# Altium PCB uTCA_MCH_PCB3.pcbdoc (part 2 of 8)
Units mm, origin at the board's own origin, x right, y up, seen from the top; angles counter-clockwise.
Board outline 182.75 x 75.8 mm, 10 copper layers (Top Layer, GND1, MidLayer1, PWR1, Mid-Layer 2, GND2, PWR2, Mid-Layer 3, GND3, Bottom Layer), stack 1.568 mm thick; 778 components, 977 nets, 4756 pads, 1214 vias.
Unrouted connection lines stored in the file: 1790.
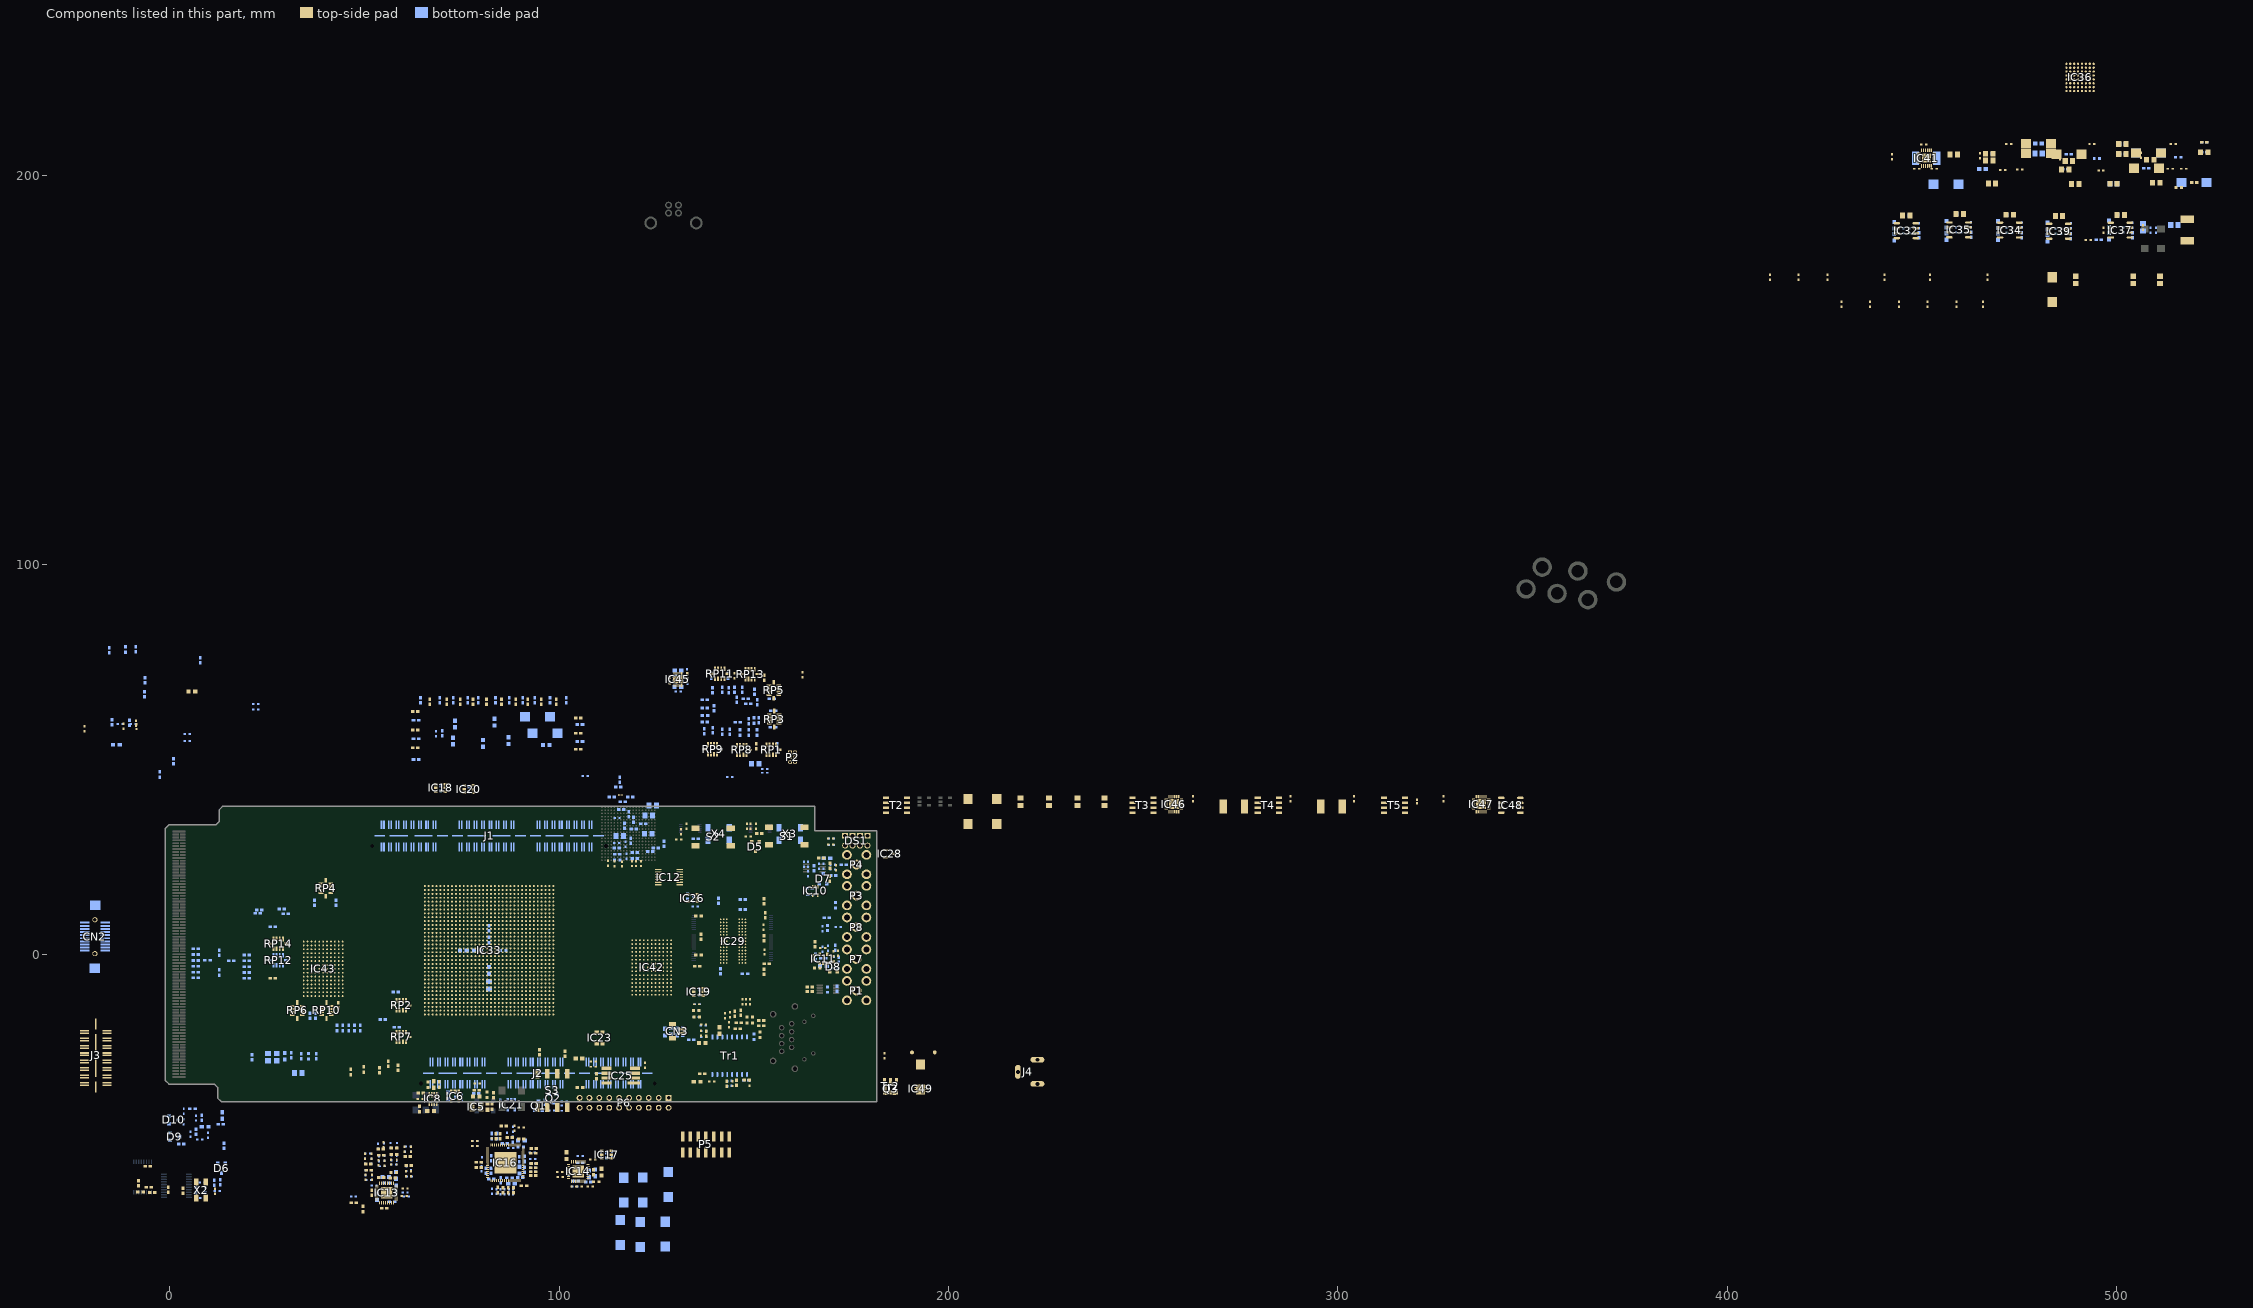
[diagram p10: the components of this part, seen from the top]

## Components (designator, comment, footprint, x,y, rotation, side; value= is the part's Value field where it differs from the comment) (continued)
R87 "200R" 0402 88.15,-60.4 r270 bottom
R88 "200R" 0402 87.15,-60.4 r270 bottom
R89 "200R" 0402 92.65,-56.7 r0 bottom
R90 "100R" 0402 82.7,-47.36 r0 top
R91 "200R" 0402 92.65,-55.75 r0 bottom
R92 "200R" 0402 92.6,-54.75 r0 bottom
R93 "200R" 0402 92.6,-53.75 r0 bottom
R94 "49R9" 0402 22.7,62.85 r180 bottom
R95 "49R9" 0402 22.7,64.25 r180 bottom
R96 "49R9" 0402 5.1,56.6 r180 bottom
R97 "49R9" 0402 5.1,54.8 r180 bottom
R98 "4K12" 0402 51.9,-57.9 r90 top
R99 "4K12" 0402 55.1,-54.3 r90 top
R100 "4K7" 0402 50.3,-57.95 r90 top
R101 "1K" 0402 51.9,-55.45 r270 bottom
R102 "4K7" 0402 53.65,-54.2 r90 top
R103 "1K" 0402 55.1,-51.75 r270 bottom
R104 "1K" 0402 50.3,-55.45 r270 bottom
R105 "1K" 0402 53.75,-51.85 r270 bottom
R106 "10k" 0402 50.45,-58 r0 bottom
R107 "4K7" 0402 53.9,-54.45 r0 bottom
R108 "4K12" 0402 -21.85,58.5 r270 top
R109 "4K12" 0402 50.2,-51.25 r270 top
R110 "4K7" 0402 -11.9,59.15 r270 top
R111 "4K7" 0402 51.8,-51.25 r270 top
R112 "1K" 0402 53.45,-49.9 r90 bottom
R113 "1K" 0402 50.2,-53.8 r90 bottom
R114 "1K" 0402 55.05,-49.8 r90 bottom
R115 "1K" 0402 51.8,-53.8 r90 bottom
R116 "22K" 0402 -12.1,59.1 r180 bottom
R117 "4K7" 0402 51.5,-51.2 r180 bottom
R118 "4K12" 0402 60.35,-49.4 r270 top
R119 "4K12" 0402 61.9,-57 r90 top
R120 "4K7" 0402 61.9,-49.45 r270 top
R121 "1K" 0402 60.4,-52 r90 bottom
R122 "4K7" 0402 60.7,-57 r90 top
R123 "1K" 0402 61.95,-54.25 r270 bottom
R124 "1K" 0402 61.95,-52.05 r90 bottom
R125 "1K" 0402 60.75,-54.4 r270 bottom
R126 "4K7" 0402 61.85,-49.4 r180 bottom
R127 "22K" 0402 60.85,-57.05 r0 bottom
R128 "10k" 0402 113.6,-50.7 r270 bottom
R129 "10k" 0402 110.8,-50.8 r270 bottom
R130 "4K12" 0402 54.95,-49.6 r90 top
R131 "4K12" 0402 58.3,-54 r90 top
R132 "4K7" 0402 -8.5,59.1 r270 top
R133 "1K" 0402 56.75,-49.75 r90 bottom
R134 "4K7" 0402 56.85,-54 r90 top
R135 "1K" 0402 58.3,-51.75 r270 bottom
R136 "1K" 0402 58.4,-49.75 r90 bottom
R137 "1K" 0402 56.9,-51.6 r270 bottom
R138 "10k" 0402 -8.7,59.1 r180 bottom
R139 "22K" 0402 56.95,-54.05 r0 bottom
R140 "Jumper" 0402 143.84,-14.87 r270 top
R141 "Jumper" 0402 142.53,-15.18 r270 top
R142 "33R" 0402 144.52,-32.57 r270 top
R143 "33R" 0402 144.27,-33.81 r90 bottom
R144 "33R" 0402 143.24,-32.63 r270 bottom
R145 "470R" 0402 143.57,-17.48 r270 top
R146 "33R" 0402 148.98,-11.58 r270 top
R147 "33R" 0402 148.03,-11.58 r270 top
R148 "Jumper" 0402 137.77,-19.66 r180 bottom
R149 "Jumper" 0402 137.61,-18.27 r180 bottom
R150 "Jumper" 0402 136.38,-20.97 r90 top
R151 "33R" 0402 147.12,-12.84 r90 top
R152 "Jumper" 0402 136.44,-18.09 r0 top
R153 "Jumper" 0402 139.81,-32.73 r180 top
R154 "49R9" 0603 150.05,-21.85 r90 bottom
R155 "49R9" 0603 151.55,-21.35 r90 top
R156 "49R9" 0603 148.2,-17.71 r0 top
R157 "49R9" 0603 148.2,-16.13 r0 top
R158 "Jumper" 0402 148.85,-32.45 r270 top
R159 "1K5" 0402 136.54,-21.26 r0 bottom
R160 "1K" 0402 169.15,28.15 r0 top
R161 "1K" 0402 169.15,29.7 r0 top
R162 "1K" 0402 169.2,29.7 r0 bottom
R163 "1K" 0402 169.2,28 r0 bottom
R164 "o.c." 0402 108.15,-27.55 r0 top
R165 "10K" 0402 109.4,-28.9 r180 top
R166 "10K" 0402 122.05,-29.2 r90 top
R167 "10K" 0402 152.71,1.2 r270 top
R168 "10K" 0402 152.53,7.58 r270 top
R169 "10K" 0402 134.32,14.8 r270 bottom
R170 "10K" 0402 135.62,12.21 r180 bottom
R171 "330K" 0402 135.85,-16.1 r180 bottom
R172 "33R" 0603 136,-16.15 r180 top
R173 "33R" 0603 134.55,-14.5 r0 top
R174 "330K" 0402 135.85,-14.5 r180 bottom
R175 "30K" 0402 136.1,-12.85 r180 bottom
R176 "22K" 0402 136,-12.85 r180 top
R177 "300R" 0402 513.1,201.7 r0 top
R178 "4K87" 0402 446.7,185.1 r90 bottom
R179 "Jumper" 0402 516.5,201.7 r0 top
R180 "2K43" 0402 449.2,186.45 r90 bottom
R181 "10k" 0402 445.25,185.1 r90 bottom
R182 "200R" 0402 506.25,204.55 r90 top
R183 "Jumper" 0402 515.1,208.1 r180 top
R184 "200R" 0402 183.6,-26.658 r90 top
R185 "4K7" 0402 473.2,185.3 r90 bottom
R186 "1K5" 0402 460.15,185.35 r90 bottom
R187 "Jumper" 0402 495.3,201.3 r0 top
R188 "10K" 0402 475.6,187.9 r270 bottom
R189 "4K7" 0402 462.6,187.95 r270 bottom
R190 "10k" 0402 471.7,185.3 r90 bottom
R191 "10k" 0402 458.7,185.35 r90 bottom
R192 "Jumper" 0402 485.35,205.45 r270 top
R193 "1K" 0402 494.25,208 r180 top
R194 "1K" 0402 470.1,201.4 r0 top
R195 "4K7" 0402 496.6,185.3 r90 top
R196 "4K87" 0402 501.7,185.35 r90 bottom
R197 "12K1" 0402 474.45,201.5 r0 top
R198 "2K43" 0402 504,186.6 r90 bottom
R199 "10k" 0402 493.25,183.45 r180 top
R200 "4K7" 0402 464.85,204.35 r90 top
R201 "4K7" 0402 472.85,208.1 r180 top
R202 "4K7" 0402 448,201.7 r0 top
R203 "4K7" 0402 452.5,201.7 r0 top
R204 "4K12" 0402 485.8,185.05 r90 bottom
R205 "1K" 0402 488.2,186.45 r90 bottom
R206 "22K" 0402 508.6,185.3 r90 bottom
R207 "10K" 0402 484.3,185.05 r90 bottom
R208 "4K7" 0402 506.7,187.25 r270 top
R209 "4K7" 0402 510,186.5 r270 bottom
R210 "Jumper" 0402 442.25,204.2 r90 top
R211 "10K" 0402 451.1,207.95 r180 top
R212 "10k" 0402 132.83,73.23 r270 bottom
R213 "10k" 0402 132.91,70.77 r270 bottom
R214 "10k" 0402 131.23,67.44 r180 bottom
R215 "249R" 0402 145,72.1 r270 top
R216 "249R" 0402 -8.7,58.7 r90 top
R217 "2K2" 0402 153.45,47.6 r180 bottom
R218 "1K" 0402 153.45,46.6 r180 bottom
R219 "2K2" 0402 89.62,-44.45 r0 top
R220 "1K" 0402 88.52,-45.38 r90 top
R221 "2K2" 0402 77.75,-47.95 r0 bottom
R222 "2K2" 0402 77.75,-49.3 r0 bottom
R223 "1K" 0402 78.95,-48 r180 top
R224 "1K" 0402 79,-49.25 r180 top
R225 "1K" 0402 88.1,-45.63 r90 bottom
R226 "2K2" 0402 46.56,-62.21 r0 bottom
R227 "o.c." 0402 429.3,166.242 r90 top
R228 "9K31" 0402 436.65,166.242 r90 top
R229 "4K7" 0402 444.05,166.242 r90 top
R230 "2K8" 0402 451.399,166.242 r90 top
R231 "10K" 0402 458.799,166.242 r90 top
R232 "4K7" 0402 465.649,166.242 r90 top
R233 "Jumper" 0402 410.949,173.242 r90 top
R234 "10K" 0402 418.299,173.242 r90 top
R235 "o.c." 0402 425.699,173.242 r90 top
R236 "1K5" 0402 440.399,173.242 r90 top
R237 "4K7" 0402 452.049,173.242 r90 top
R238 "10K" 0402 466.799,173.242 r90 top
R239 "4K7" 0402 287.849,39.242 r90 top
R240 "4K7" 0402 304.099,39.242 r90 top
R241 "13k" RESC1005X40N 320.299,39.242 r90 top
R242 "10K" 0402 327.149,39.242 r90 top
R243 "4K7" 0402 262.749,39.242 r90 top
RP1 "47R x 8" EXBE 154.46,52.51 r270 top
RP2 "47R x 8" EXBE 59.45,-13.15 r90 top
RP3 "47R x 8" EXBE 155.22,60.39 r180 top
RP4 "47R x 8" EXBE 40.1,16.95 r0 top
RP5 "47R x 8" EXBE 155.15,67.81 r0 top
RP6 "47R x 8" EXBE 32.75,-14.45 r0 top
RP7 "47R x 8" EXBE 59.45,-21.25 r270 top
RP8 "47R x 8" EXBE 146.89,52.44 r90 top
RP9 "47R x 8" EXBE 139.39,52.59 r90 top
RP10 "47R x 8" EXBE 40.25,-14.45 r0 top
RP11 "47R x 8" EXBE 141.23,72.02 r90 top
RP12 "47R x 8" EXBE 27.85,-1.55 r270 bottom
RP13 "47R x 8" EXBE 149.03,71.94 r270 top
RP14 "47R x 8" EXBE 27.85,2.65 r90 top
S1 "FSM6JSMA" SWITCH 158.43,30.32 r90 top
S2 "FSM6JSMA" SWITCH 139.54,30.14 r270 top
S3 "219-4MST" NHDS-8 102.05,-30.65 r270 top
T2 "IRF9910Pbf" SOIC127P600X175-8N 186.65,38.242 r0 top
T3 "IRF9910Pbf" SOIC127P600X175-8N 249.899,38.242 r0 top
T4 "IRF9910Pbf" SOIC127P600X175-8N 282.099,38.242 r0 top
T5 "IRF9910Pbf" SOIC127P600X175-8N 314.549,38.242 r0 top
TP1 "Test Point" TEST_PAD_1mm 196.45,-25.208 r90 top
TP2 "Test Point" TEST_PAD_1mm 190.6,-25.208 r90 top
Tr1 "TR_H1260NL" H1260NL 139.36,-21.23 r270 bottom
Tr2 "WBC1-1LB" SMT6P150P 183.55,-32.408 r0 top
X1 "R26-32.768- 12.5" XTAL_32k 115.7,40.9 r180 top
X2 "ABM3B 18.432 MHz" XTALL_ABM3 6.85,-58.55 r270 top
X3 "ABS25-32.768KHZ-6-T" ABS25 159.22,30.89 r90 bottom
X4 "ABS25-32.768KHZ-6-T" ABS25 140.94,30.89 r90 bottom

## Footprints (in the part's own frame and the unit in brackets; to place one, negate y for a bottom-side part, rotate by r counter-clockwise, add the part's x,y. Pads: shape width x height; smd on the part's side, far side on the other; paste and mask are expansions set on the pad)
"3 mm LED Quad-Level" [mil]
  round 60 hole 40: 1(-50,112.5) 3(-50,37.5) 5(-50,-37.5) 7(-50,-112.5)
  rect 60x60 hole 40: 2(50,112.5) 4(50,37.5) 6(50,-37.5) 8(50,-112.5)
  silkscreen extent -89,-196 89,226
8CN3 [mm] "Double Row QFN, 8Leads, Body 6,1x8,1mm (max), Pitch 1,27mm, IPC Medium Density"
  rect 3.2x0.8 smd: 1(-3.35,1.905)
  rect 2.6x0.8 smd: 2(-3.65,0.635) 3(-3.65,-0.635) 4(-3.65,-1.905) 5(3.65,-1.905) 6(3.65,-0.635) 7(3.65,0.635) 8(3.65,1.905)
  silkscreen extent -4.82,-3.05 4.05,3.25, body extent -4.06,-3.05 4.06,3.02, height 1
0402 [mil]
  rect 25x20 smd: 1(0,0) 2(50,0)
  silkscreen extent -30,-25 77,25
0603 [mil]
  rect 30x30 smd: 1(0,0) 2(55,0)
  silkscreen extent -30,-30 85,30
ABS25 [mm] "32.768 kHzFREQUENCY SMD CRYSTAL LOW PROFILE, HEAT RESISTANT PLASTIC PACKAGE"
  rect 1.9x1.3 smd: 1(1.6,-2.75) 2(1.6,2.75) 3(-1.6,2.75) 4(-1.6,-2.75)
  silkscreen extent -1.6,-4 1.6,4
BGA64C100P8X8_1300X1000X120 [mm] "BGA, 64-Leads, Body 13,0x10,0mm,  Pitch 1,00mm"
  round 0.58 smd: A1(-3.5,3.5) A2(-2.5,3.5) A3(-1.5,3.5) A4(-0.5,3.5) A5(0.5,3.5) A6(1.5,3.5) A7(2.5,3.5) A8(3.5,3.5) B1(-3.5,2.5) B2(-2.5,2.5) B3(-1.5,2.5) B4(-0.5,2.5) B5(0.5,2.5) B6(1.5,2.5) B7(2.5,2.5) B8(3.5,2.5) C1(-3.5,1.5) C2(-2.5,1.5) C3(-1.5,1.5) C4(-0.5,1.5) C5(0.5,1.5) C6(1.5,1.5) C7(2.5,1.5) C8(3.5,1.5) D1(-3.5,0.5) D2(-2.5,0.5) D3(-1.5,0.5) D4(-0.5,0.5) D5(0.5,0.5) D6(1.5,0.5) D7(2.5,0.5) D8(3.5,0.5) E1(-3.5,-0.5) E2(-2.5,-0.5) E3(-1.5,-0.5) E4(-0.5,-0.5) E5(0.5,-0.5) E6(1.5,-0.5) E7(2.5,-0.5) E8(3.5,-0.5) F1(-3.5,-1.5) F2(-2.5,-1.5) F3(-1.5,-1.5) F4(-0.5,-1.5) F5(0.5,-1.5) F6(1.5,-1.5) F7(2.5,-1.5) F8(3.5,-1.5) G1(-3.5,-2.5) G2(-2.5,-2.5) G3(-1.5,-2.5) G4(-0.5,-2.5) G5(0.5,-2.5) G6(1.5,-2.5) G7(2.5,-2.5) G8(3.5,-2.5) H1(-3.5,-3.5) H2(-2.5,-3.5) H3(-1.5,-3.5) H4(-0.5,-3.5) H5(0.5,-3.5) H6(1.5,-3.5) H7(2.5,-3.5) H8(3.5,-3.5)
  silkscreen extent -5.77,-6.5 5,6.5, body extent -5,-6.5 5,6.5, height 1.2
BGA90C80P9X15_1300X1100X120 [mm] "BGA 0.8mm, Pitch, Square 90 Pin, 9 Columns x 15 Rows, Body 13mm X 11mm X 1.2mm H"
  round 0.4 smd: A1(-3.2,5.6) A2(-2.4,5.6) A3(-1.6,5.6) A7(1.6,5.6) A8(2.4,5.6) A9(3.2,5.6) B1(-3.2,4.8) B2(-2.4,4.8) B3(-1.6,4.8) B7(1.6,4.8) B8(2.4,4.8) B9(3.2,4.8) C1(-3.2,4) C2(-2.4,4) C3(-1.6,4) C7(1.6,4) C8(2.4,4) C9(3.2,4) D1(-3.2,3.2) D2(-2.4,3.2) D3(-1.6,3.2) D7(1.6,3.2) D8(2.4,3.2) D9(3.2,3.2) E1(-3.2,2.4) E2(-2.4,2.4) E3(-1.6,2.4) E7(1.6,2.4) E8(2.4,2.4) E9(3.2,2.4) F1(-3.2,1.6) F2(-2.4,1.6) F3(-1.6,1.6) F7(1.6,1.6) F8(2.4,1.6) F9(3.2,1.6) G1(-3.2,0.8) G2(-2.4,0.8) G3(-1.6,0.8) G7(1.6,0.8) G8(2.4,0.8) G9(3.2,0.8) H1(-3.2,0) H2(-2.4,0) H3(-1.6,0) H7(1.6,0) H8(2.4,0) H9(3.2,0) J1(-3.2,-0.8) J2(-2.4,-0.8) J3(-1.6,-0.8) J7(1.6,-0.8) J8(2.4,-0.8) J9(3.2,-0.8) K1(-3.2,-1.6) K2(-2.413,-1.6) K3(-1.6,-1.6) K7(1.6,-1.6) K8(2.4,-1.6) K9(3.2,-1.6) L1(-3.2,-2.4) L2(-2.4,-2.4) L3(-1.6,-2.4) L7(1.6,-2.4) L8(2.4,-2.4) L9(3.2,-2.4) M1(-3.2,-3.2) M2(-2.4,-3.2) M3(-1.6,-3.2) M7(1.6,-3.2) M8(2.4,-3.2) M9(3.2,-3.2) N1(-3.2,-4) N2(-2.4,-4) N3(-1.6,-4) N7(1.6,-4) N8(2.4,-4) N9(3.2,-4) P1(-3.2,-4.8) P2(-2.4,-4.8) P3(-1.6,-4.8) P7(1.6,-4.8) P8(2.4,-4.8) P9(3.2,-4.8) R1(-3.2,-5.6) R2(-2.4,-5.6) R3(-1.6,-5.6) R7(1.6,-5.6) R8(2.4,-5.6) R9(3.2,-5.6)
  silkscreen extent -6.16,-6.5 5.5,6.5
BGA165C100P11X15_1300X1500X140 [mm] "BGA, 1.00mm pitch,rect.;165 pin, 11 columns X 15 rows, 13.00mm X 15.00mm X 1.40mm H"
  round 0.45 smd: A1(-5,7) A2(-4,7) A3(-3,7) A4(-2,7) A5(-1,7) A6(0,7) A7(1,7) A8(2,7) A9(3,7) A10(4,7) A11(5,7) B1(-5,6) B2(-4,6) B3(-3,6) B4(-2,6) B5(-1,6) B6(0,6) B7(1,6) B8(2,6) B9(3,6) B10(4,6) B11(5,6) C1(-5,5) C2(-4,5) C3(-3,5) C4(-2,5) C5(-1,5) C6(0,5) C7(1,5) C8(2,5) C9(3,5) C10(4,5) C11(5,5) D1(-5,4) D2(-4,4) D3(-3,4) D4(-2,4) D5(-1,4) D6(0,4) D7(1,4) D8(2,4) D9(3,4) D10(4,4) D11(5,4) E1(-5,3) E2(-4,3) E3(-3,3) E4(-2,3) E5(-1,3) E6(0,3) E7(1,3) E8(2,3) E9(3,3) E10(4,3) E11(5,3) F1(-5,2) F2(-4,2) F3(-3,2) F4(-2,2) F5(-1,2) F6(0,2) F7(1,2) F8(2,2) F9(3,2) F10(4,2) F11(5,2) G1(-5,1) G2(-4,1) G3(-3,1) G4(-2,1) G5(-1,1) G6(0,1) G7(1,1) G8(2,1) G9(3,1) G10(4,1) G11(5,1) H1(-5,0) H2(-4,0) H3(-3,0) H4(-2,0) H5(-1,0) H6(0,0) H7(1,0) H8(2,0) H9(3,0) H10(4,0) H11(5,0) J1(-5,-1) J2(-4,-1) J3(-3,-1) J4(-2,-1) J5(-1,-1) J6(0,-1) J7(1,-1) J8(2,-1) J9(3,-1) J10(4,-1) J11(5,-1) K1(-5,-2) K2(-4,-2) K3(-3,-2) K4(-2,-2) K5(-1,-2) K6(0,-2) K7(1,-2) K8(2,-2) K9(3,-2) K10(4,-2) K11(5,-2) L1(-5,-3) L2(-4,-3) L3(-3,-3) L4(-2,-3) L5(-1,-3) L6(0,-3) L7(1,-3) L8(2,-3) L9(3,-3) L10(4,-3) L11(5,-3) M1(-5,-4) M2(-4,-4) M3(-3,-4) M4(-2,-4) M5(-1,-4) M6(0,-4) M7(1,-4) M8(2,-4) M9(3,-4) M10(4,-4) M11(5,-4) N1(-5,-5) N2(-4,-5) N3(-3,-5) N4(-2,-5) N5(-1,-5) N6(0,-5) N7(1,-5) N8(2,-5) N9(3,-5) N10(4,-5) N11(5,-5) P1(-5,-6) P2(-4,-6) P3(-3,-6) P4(-2,-6) P5(-1,-6) P6(0,-6) P7(1,-6) P8(2,-6) P9(3,-6) P10(4,-6) P11(5,-6) R1(-5,-7) R2(-4,-7) R3(-3,-7) R4(-2,-7) R5(-1,-7) R6(0,-7) R7(1,-7) R8(2,-7) R9(3,-7) R10(4,-7) R11(5,-7)
  silkscreen extent -7.23,-7.6 6.5,7.87, body extent -6.5,-7.5 6.5,7.5, height 1.4
CC1005-0402 [mm]
  rect 0.9x0.7 smd: 1(-0.65,0) 2(0.65,0)
  silkscreen extent -1.5,-0.75 1.5,0.75
CC1608-0603 [mm]
  rect 1.1x1 smd: 1(-0.85,0) 2(0.85,0)
  silkscreen extent -1.8,-0.9 1.8,0.9
CC2012-0805 [mm]
  rect 1.3x1.5 smd: 1(-0.95,0) 2(0.95,0)
  silkscreen extent -2,-1.15 2,1.15
CONN_HDR_SMD_2mm_2x7 [mm]
  rect 0.9x2.6 smd: 1(0,0) 2(0,4.1) 3(2,0) 4(2,4.1) 5(4,0) 6(4,4.1) 7(6,0) 8(6,4.1) 9(8,0) 10(8,4.1) 11(10,0) 12(10,4.1) 13(12,0) 14(12,4.1)
  silkscreen extent -1.2,-0.7 13.2,4.7
D [mm] "Capacitor, SM Tantalum; Body 7.3 x 4.3 mm (LxW typ)"
  rect 2.6x2.4 smd: 1(-3.2,0) 2(3.2,0)
  silkscreen extent -4.57,-2.3 3.8,2.42
dc-10 [mm] "DC-10 PCB mounting  pin / ring type with  switch. Rated 12V /  5A. DC10A with  2.1mm dia. pin.  DC10B with 2.5mm  dia. pin"
  rrect100% 1.4x3.6 hole 1 slot 3.2 at 90 deg: 1(0,0) 3(6.2,0)
  rrect100% 3.6x1.4 hole 1 slot 3.2 at 0 deg: 2(3.1,5)
  silkscreen extent -1,-4.5 13.7,4.5
EXBE [mm] "Resistor Array"
  rect 0.6x1.2 smd: 1(0,2.05) 6(0,-2.05)
  rect 1.2x0.5 smd: 2(-1.25,1.2) 3(-1.25,0.4) 4(-1.25,-0.4) 5(-1.25,-1.2) 7(1.25,-1.2) 8(1.25,-0.4) 9(1.25,0.4) 10(1.25,1.2)
  silkscreen extent -2.05,-2.85 2.05,2.85
FF1156 [mm] "BGA, 1156-Leads, Body 35x35mm, Pitch 1mm"
  round 0.5 smd: A1(-16.5,16.5) A2(-15.5,16.5) A3(-14.5,16.5) A4(-13.5,16.5) A5(-12.5,16.5) A6(-11.5,16.5) A7(-10.5,16.5) A8(-9.5,16.5) A9(-8.5,16.5) A10(-7.5,16.5) A11(-6.5,16.5) A12(-5.5,16.5) A13(-4.5,16.5) A14(-3.5,16.5) A15(-2.5,16.5) A16(-1.5,16.5) A17(-0.5,16.5) A18(0.5,16.5) A19(1.5,16.5) A20(2.5,16.5) A21(3.5,16.5) A22(4.5,16.5) A23(5.5,16.5) A24(6.5,16.5) A25(7.5,16.5) A26(8.5,16.5) A27(9.5,16.5) A28(10.5,16.5) A29(11.5,16.5) A30(12.5,16.5) A31(13.5,16.5) A32(14.5,16.5) A33(15.5,16.5) A34(16.5,16.5) AA1(-16.5,-3.5) AA2(-15.5,-3.5) AA3(-14.5,-3.5) AA4(-13.5,-3.5) AA5(-12.5,-3.5) AA6(-11.5,-3.5) AA7(-10.5,-3.5) AA8(-9.5,-3.5) AA9(-8.5,-3.5) AA10(-7.5,-3.5) AA11(-6.5,-3.5) AA12(-5.5,-3.5) AA13(-4.5,-3.5) AA14(-3.5,-3.5) AA15(-2.5,-3.5) AA16(-1.5,-3.5) AA17(-0.5,-3.5) AA18(0.5,-3.5) AA19(1.5,-3.5) AA20(2.5,-3.5) AA21(3.5,-3.5) AA22(4.5,-3.5) AA23(5.5,-3.5) AA24(6.5,-3.5) AA25(7.5,-3.5) AA26(8.5,-3.5) AA27(9.5,-3.5) AA28(10.5,-3.5) AA29(11.5,-3.5) AA30(12.5,-3.5) AA31(13.5,-3.5) AA32(14.5,-3.5) AA33(15.5,-3.5) AA34(16.5,-3.5) AB1(-16.5,-4.5) AB2(-15.5,-4.5) AB3(-14.5,-4.5) AB4(-13.5,-4.5) AB5(-12.5,-4.5) AB6(-11.5,-4.5) AB7(-10.5,-4.5) AB8(-9.5,-4.5) AB9(-8.5,-4.5) AB10(-7.5,-4.5) AB11(-6.5,-4.5) AB12(-5.5,-4.5) AB13(-4.5,-4.5) AB14(-3.5,-4.5) AB15(-2.5,-4.5) AB16(-1.5,-4.5) AB17(-0.5,-4.5) AB18(0.5,-4.5) AB19(1.5,-4.5) AB20(2.5,-4.5) AB21(3.5,-4.5) AB22(4.5,-4.5) AB23(5.5,-4.5) AB24(6.5,-4.5) AB25(7.5,-4.5) AB26(8.5,-4.5) AB27(9.5,-4.5) AB28(10.5,-4.5) AB29(11.5,-4.5) AB30(12.5,-4.5) AB31(13.5,-4.5) AB32(14.5,-4.5) AB33(15.5,-4.5) AB34(16.5,-4.5) AC1(-16.5,-5.5) AC2(-15.5,-5.5) AC3(-14.5,-5.5) AC4(-13.5,-5.5) AC5(-12.5,-5.5) AC6(-11.5,-5.5) AC7(-10.5,-5.5) AC8(-9.5,-5.5) AC9(-8.5,-5.5) AC10(-7.5,-5.5) AC11(-6.5,-5.5) AC12(-5.5,-5.5) AC13(-4.5,-5.5) AC14(-3.5,-5.5) AC15(-2.5,-5.5) AC16(-1.5,-5.5) AC17(-0.5,-5.5) AC18(0.5,-5.5) AC19(1.5,-5.5) AC20(2.5,-5.5) AC21(3.5,-5.5) AC22(4.5,-5.5) AC23(5.5,-5.5) AC24(6.5,-5.5) AC25(7.5,-5.5) AC26(8.5,-5.5) AC27(9.5,-5.5) AC28(10.5,-5.5) AC29(11.5,-5.5) AC30(12.5,-5.5) AC31(13.5,-5.5) AC32(14.5,-5.5) AC33(15.5,-5.5) AC34(16.5,-5.5) AD1(-16.5,-6.5) AD2(-15.5,-6.5) AD3(-14.5,-6.5) AD4(-13.5,-6.5) AD5(-12.5,-6.5) AD6(-11.5,-6.5) AD7(-10.5,-6.5) AD8(-9.5,-6.5) AD9(-8.5,-6.5) AD10(-7.5,-6.5) AD11(-6.5,-6.5) AD12(-5.5,-6.5) AD13(-4.5,-6.5) AD14(-3.5,-6.5) AD15(-2.5,-6.5) AD16(-1.5,-6.5) AD17(-0.5,-6.5) AD18(0.5,-6.5) AD19(1.5,-6.5) AD20(2.5,-6.5) AD21(3.5,-6.5) AD22(4.5,-6.5) AD23(5.5,-6.5) AD24(6.5,-6.5) AD25(7.5,-6.5) AD26(8.5,-6.5) AD27(9.5,-6.5) AD28(10.5,-6.5) AD29(11.5,-6.5) AD30(12.5,-6.5) AD31(13.5,-6.5) AD32(14.5,-6.5) AD33(15.5,-6.5) AD34(16.5,-6.5) AE1(-16.5,-7.5) AE2(-15.5,-7.5) AE3(-14.5,-7.5) AE4(-13.5,-7.5) AE5(-12.5,-7.5) AE6(-11.5,-7.5) AE7(-10.5,-7.5) AE8(-9.5,-7.5) AE9(-8.5,-7.5) AE10(-7.5,-7.5) AE11(-6.5,-7.5) AE12(-5.5,-7.5) AE13(-4.5,-7.5) AE14(-3.5,-7.5) AE15(-2.5,-7.5) AE16(-1.5,-7.5) AE17(-0.5,-7.5) AE18(0.5,-7.5) AE19(1.5,-7.5) AE20(2.5,-7.5) AE21(3.5,-7.5) AE22(4.5,-7.5) AE23(5.5,-7.5) AE24(6.5,-7.5) AE25(7.5,-7.5) AE26(8.5,-7.5) AE27(9.5,-7.5) AE28(10.5,-7.5) AE29(11.5,-7.5) AE30(12.5,-7.5) AE31(13.5,-7.5) AE32(14.5,-7.5) AE33(15.5,-7.5) AE34(16.5,-7.5) AF1(-16.5,-8.5) AF2(-15.5,-8.5) AF3(-14.5,-8.5) AF4(-13.5,-8.5) AF5(-12.5,-8.5) AF6(-11.5,-8.5) AF7(-10.5,-8.5) AF8(-9.5,-8.5) AF9(-8.5,-8.5) AF10(-7.5,-8.5) AF11(-6.5,-8.5) AF12(-5.5,-8.5) AF13(-4.5,-8.5) AF14(-3.5,-8.5) AF15(-2.5,-8.5) AF16(-1.5,-8.5) AF17(-0.5,-8.5) AF18(0.5,-8.5) AF19(1.5,-8.5) AF20(2.5,-8.5) AF21(3.5,-8.5) AF22(4.5,-8.5) AF23(5.5,-8.5) AF24(6.5,-8.5) AF25(7.5,-8.5) AF26(8.5,-8.5) AF27(9.5,-8.5) AF28(10.5,-8.5) AF29(11.5,-8.5) AF30(12.5,-8.5) AF31(13.5,-8.5) AF32(14.5,-8.5) AF33(15.5,-8.5) AF34(16.5,-8.5) AG1(-16.5,-9.5) AG2(-15.5,-9.5) AG3(-14.5,-9.5) AG4(-13.5,-9.5) AG5(-12.5,-9.5) AG6(-11.5,-9.5) AG7(-10.5,-9.5) AG8(-9.5,-9.5) AG9(-8.5,-9.5) AG10(-7.5,-9.5) AG11(-6.5,-9.5) AG12(-5.5,-9.5) AG13(-4.5,-9.5) AG14(-3.5,-9.5) AG15(-2.5,-9.5) AG16(-1.5,-9.5) AG17(-0.5,-9.5) AG18(0.5,-9.5) AG19(1.5,-9.5) AG20(2.5,-9.5) AG21(3.5,-9.5) AG22(4.5,-9.5) AG23(5.5,-9.5) AG24(6.5,-9.5) AG25(7.5,-9.5) AG26(8.5,-9.5) AG27(9.5,-9.5) AG28(10.5,-9.5) AG29(11.5,-9.5) AG30(12.5,-9.5) AG31(13.5,-9.5) AG32(14.5,-9.5) AG33(15.5,-9.5) AG34(16.5,-9.5) AH1(-16.5,-10.5) AH2(-15.5,-10.5) AH3(-14.5,-10.5) AH4(-13.5,-10.5) AH5(-12.5,-10.5) AH6(-11.5,-10.5) AH7(-10.5,-10.5) AH8(-9.5,-10.5) AH9(-8.5,-10.5) AH10(-7.5,-10.5) AH11(-6.5,-10.5) AH12(-5.5,-10.5) AH13(-4.5,-10.5) AH14(-3.5,-10.5) AH15(-2.5,-10.5) AH16(-1.5,-10.5) AH17(-0.5,-10.5) AH18(0.5,-10.5) AH19(1.5,-10.5) AH20(2.5,-10.5) AH21(3.5,-10.5) AH22(4.5,-10.5) AH23(5.5,-10.5) AH24(6.5,-10.5) AH25(7.5,-10.5) AH26(8.5,-10.5) AH27(9.5,-10.5) AH28(10.5,-10.5) AH29(11.5,-10.5) AH30(12.5,-10.5) AH31(13.5,-10.5) AH32(14.5,-10.5) AH33(15.5,-10.5) AH34(16.5,-10.5) AJ1(-16.5,-11.5) AJ2(-15.5,-11.5) AJ3(-14.5,-11.5) AJ4(-13.5,-11.5) AJ5(-12.5,-11.5) AJ6(-11.5,-11.5) AJ7(-10.5,-11.5) AJ8(-9.5,-11.5) AJ9(-8.5,-11.5) AJ10(-7.5,-11.5) AJ11(-6.5,-11.5) AJ12(-5.5,-11.5) AJ13(-4.5,-11.5) AJ14(-3.5,-11.5) AJ15(-2.5,-11.5) AJ16(-1.5,-11.5) AJ17(-0.5,-11.5) AJ18(0.5,-11.5) AJ19(1.5,-11.5) AJ20(2.5,-11.5) AJ21(3.5,-11.5) AJ22(4.5,-11.5) AJ23(5.5,-11.5) AJ24(6.5,-11.5) AJ25(7.5,-11.5) AJ26(8.5,-11.5) AJ27(9.5,-11.5) AJ28(10.5,-11.5) AJ29(11.5,-11.5) AJ30(12.5,-11.5) AJ31(13.5,-11.5) AJ32(14.5,-11.5) AJ33(15.5,-11.5) AJ34(16.5,-11.5) AK1(-16.5,-12.5) AK2(-15.5,-12.5) AK3(-14.5,-12.5) AK4(-13.5,-12.5) AK5(-12.5,-12.5) AK6(-11.5,-12.5) AK7(-10.5,-12.5) AK8(-9.5,-12.5) AK9(-8.5,-12.5) AK10(-7.5,-12.5) AK11(-6.5,-12.5) AK12(-5.5,-12.5) AK13(-4.5,-12.5) AK14(-3.5,-12.5) AK15(-2.5,-12.5) AK16(-1.5,-12.5) AK17(-0.5,-12.5) AK18(0.5,-12.5) AK19(1.5,-12.5) AK20(2.5,-12.5) AK21(3.5,-12.5) AK22(4.5,-12.5) AK23(5.5,-12.5) AK24(6.5,-12.5) AK25(7.5,-12.5) AK26(8.5,-12.5) AK27(9.5,-12.5) AK28(10.5,-12.5) AK29(11.5,-12.5) AK30(12.5,-12.5) AK31(13.5,-12.5) AK32(14.5,-12.5) AK33(15.5,-12.5) AK34(16.5,-12.5) AL1(-16.5,-13.5) AL2(-15.5,-13.5) AL3(-14.5,-13.5) AL4(-13.5,-13.5) AL5(-12.5,-13.5) AL6(-11.5,-13.5) AL7(-10.5,-13.5) AL8(-9.5,-13.5) AL9(-8.5,-13.5) AL10(-7.5,-13.5) AL11(-6.5,-13.5) AL12(-5.5,-13.5) AL13(-4.5,-13.5) AL14(-3.5,-13.5) AL15(-2.5,-13.5) AL16(-1.5,-13.5) AL17(-0.5,-13.5) AL18(0.5,-13.5) AL19(1.5,-13.5) AL20(2.5,-13.5) AL21(3.5,-13.5) AL22(4.5,-13.5) AL23(5.5,-13.5) AL24(6.5,-13.5) AL25(7.5,-13.5) AL26(8.5,-13.5) AL27(9.5,-13.5) AL28(10.5,-13.5) AL29(11.5,-13.5) AL30(12.5,-13.5) AL31(13.5,-13.5) AL32(14.5,-13.5) AL33(15.5,-13.5) AL34(16.5,-13.5) AM1(-16.5,-14.5) AM2(-15.5,-14.5) AM3(-14.5,-14.5) AM4(-13.5,-14.5) AM5(-12.5,-14.5) AM6(-11.5,-14.5) AM7(-10.5,-14.5) AM8(-9.5,-14.5) AM9(-8.5,-14.5) AM10(-7.5,-14.5) AM11(-6.5,-14.5) AM12(-5.5,-14.5) AM13(-4.5,-14.5) AM14(-3.5,-14.5) AM15(-2.5,-14.5) AM16(-1.5,-14.5) AM17(-0.5,-14.5) AM18(0.5,-14.5) AM19(1.5,-14.5) AM20(2.5,-14.5) AM21(3.5,-14.5) AM22(4.5,-14.5) AM23(5.5,-14.5) AM24(6.5,-14.5) AM25(7.5,-14.5) AM26(8.5,-14.5) AM27(9.5,-14.5) AM28(10.5,-14.5) AM29(11.5,-14.5) AM30(12.5,-14.5) AM31(13.5,-14.5) AM32(14.5,-14.5) AM33(15.5,-14.5) AM34(16.5,-14.5) AN1(-16.5,-15.5) AN2(-15.5,-15.5) AN3(-14.5,-15.5) AN4(-13.5,-15.5) AN5(-12.5,-15.5) AN6(-11.5,-15.5) AN7(-10.5,-15.5) AN8(-9.5,-15.5) AN9(-8.5,-15.5) AN10(-7.5,-15.5) AN11(-6.5,-15.5) AN12(-5.5,-15.5) AN13(-4.5,-15.5) AN14(-3.5,-15.5) AN15(-2.5,-15.5) AN16(-1.5,-15.5) AN17(-0.5,-15.5) AN18(0.5,-15.5) AN19(1.5,-15.5) AN20(2.5,-15.5) AN21(3.5,-15.5) AN22(4.5,-15.5) AN23(5.5,-15.5) AN24(6.5,-15.5) AN25(7.5,-15.5) AN26(8.5,-15.5) AN27(9.5,-15.5) AN28(10.5,-15.5) AN29(11.5,-15.5) AN30(12.5,-15.5) AN31(13.5,-15.5) AN32(14.5,-15.5) AN33(15.5,-15.5) AN34(16.5,-15.5) AP1(-16.5,-16.5) AP2(-15.5,-16.5) AP3(-14.5,-16.5) AP4(-13.5,-16.5) AP5(-12.5,-16.5) AP6(-11.5,-16.5) AP7(-10.5,-16.5) AP8(-9.5,-16.5) AP9(-8.5,-16.5) AP10(-7.5,-16.5) AP11(-6.5,-16.5) AP12(-5.5,-16.5) AP13(-4.5,-16.5) AP14(-3.5,-16.5) AP15(-2.5,-16.5) AP16(-1.5,-16.5) AP17(-0.5,-16.5) AP18(0.5,-16.5) AP19(1.5,-16.5) AP20(2.5,-16.5) AP21(3.5,-16.5) AP22(4.5,-16.5) AP23(5.5,-16.5) AP24(6.5,-16.5) AP25(7.5,-16.5) AP26(8.5,-16.5) AP27(9.5,-16.5) AP28(10.5,-16.5) AP29(11.5,-16.5) AP30(12.5,-16.5) AP31(13.5,-16.5) AP32(14.5,-16.5) AP33(15.5,-16.5) AP34(16.5,-16.5) B1(-16.5,15.5) B2(-15.5,15.5) B3(-14.5,15.5) B4(-13.5,15.5) B5(-12.5,15.5) B6(-11.5,15.5) B7(-10.5,15.5) B8(-9.5,15.5) B9(-8.5,15.5) B10(-7.5,15.5) B11(-6.5,15.5) B12(-5.5,15.5) B13(-4.5,15.5) B14(-3.5,15.5) B15(-2.5,15.5) B16(-1.5,15.5) B17(-0.5,15.5) B18(0.5,15.5) B19(1.5,15.5) B20(2.5,15.5) B21(3.5,15.5) B22(4.5,15.5) B23(5.5,15.5) B24(6.5,15.5) B25(7.5,15.5) B26(8.5,15.5) B27(9.5,15.5) B28(10.5,15.5) B29(11.5,15.5) B30(12.5,15.5) B31(13.5,15.5) B32(14.5,15.5) B33(15.5,15.5) B34(16.5,15.5) C1(-16.5,14.5) C2(-15.5,14.5) C3(-14.5,14.5) C4(-13.5,14.5) C5(-12.5,14.5) C6(-11.5,14.5) C7(-10.5,14.5) C8(-9.5,14.5) C9(-8.5,14.5) C10(-7.5,14.5) C11(-6.5,14.5) C12(-5.5,14.5) C13(-4.5,14.5) C14(-3.5,14.5) C15(-2.5,14.5) C16(-1.5,14.5) C17(-0.5,14.5) C18(0.5,14.5) C19(1.5,14.5) C20(2.5,14.5) C21(3.5,14.5) C22(4.5,14.5) C23(5.5,14.5) C24(6.5,14.5) C25(7.5,14.5) C26(8.5,14.5) C27(9.5,14.5) C28(10.5,14.5) C29(11.5,14.5) C30(12.5,14.5) C31(13.5,14.5) C32(14.5,14.5) C33(15.5,14.5) C34(16.5,14.5) D1(-16.5,13.5) D2(-15.5,13.5) D3(-14.5,13.5) D4(-13.5,13.5) D5(-12.5,13.5) D6(-11.5,13.5) D7(-10.5,13.5) D8(-9.5,13.5) D9(-8.5,13.5) D10(-7.5,13.5) D11(-6.5,13.5) D12(-5.5,13.5) D13(-4.5,13.5) D14(-3.5,13.5) D15(-2.5,13.5) D16(-1.5,13.5) D17(-0.5,13.5) D18(0.5,13.5) D19(1.5,13.5) D20(2.5,13.5) D21(3.5,13.5) D22(4.5,13.5) D23(5.5,13.5) D24(6.5,13.5) D25(7.5,13.5) D26(8.5,13.5) D27(9.5,13.5) D28(10.5,13.5) D29(11.5,13.5) D30(12.5,13.5) D31(13.5,13.5) D32(14.5,13.5) D33(15.5,13.5) D34(16.5,13.5) E1(-16.5,12.5) E2(-15.5,12.5) E3(-14.5,12.5) E4(-13.5,12.5) E5(-12.5,12.5) E6(-11.5,12.5) E7(-10.5,12.5) E8(-9.5,12.5) E9(-8.5,12.5) E10(-7.5,12.5) E11(-6.5,12.5) E12(-5.5,12.5) E13(-4.5,12.5) E14(-3.5,12.5) E15(-2.5,12.5) E16(-1.5,12.5) E17(-0.5,12.5) E18(0.5,12.5) E19(1.5,12.5) E20(2.5,12.5) E21(3.5,12.5) E22(4.5,12.5) E23(5.5,12.5) E24(6.5,12.5) E25(7.5,12.5) E26(8.5,12.5) E27(9.5,12.5) E28(10.5,12.5) E29(11.5,12.5) E30(12.5,12.5) E31(13.5,12.5) E32(14.5,12.5) E33(15.5,12.5) E34(16.5,12.5) F1(-16.5,11.5) F2(-15.5,11.5) F3(-14.5,11.5) F4(-13.5,11.5) F5(-12.5,11.5) F6(-11.5,11.5) F7(-10.5,11.5) F8(-9.5,11.5) F9(-8.5,11.5) F10(-7.5,11.5) F11(-6.5,11.5) F12(-5.5,11.5) F13(-4.5,11.5) F14(-3.5,11.5) F15(-2.5,11.5) F16(-1.5,11.5) F17(-0.5,11.5) F18(0.5,11.5) F19(1.5,11.5) F20(2.5,11.5) F21(3.5,11.5) F22(4.5,11.5) F23(5.5,11.5) F24(6.5,11.5) F25(7.5,11.5) F26(8.5,11.5) F27(9.5,11.5) F28(10.5,11.5) F29(11.5,11.5) F30(12.5,11.5) F31(13.5,11.5) F32(14.5,11.5) F33(15.5,11.5) F34(16.5,11.5) G1(-16.5,10.5) G2(-15.5,10.5) G3(-14.5,10.5) G4(-13.5,10.5) G5(-12.5,10.5) G6(-11.5,10.5) G7(-10.5,10.5) G8(-9.5,10.5) G9(-8.5,10.5) G10(-7.5,10.5) G11(-6.5,10.5) G12(-5.5,10.5) G13(-4.5,10.5) G14(-3.5,10.5) G15(-2.5,10.5) G16(-1.5,10.5) G17(-0.5,10.5) G18(0.5,10.5) G19(1.5,10.5) G20(2.5,10.5) G21(3.5,10.5) G22(4.5,10.5) G23(5.5,10.5) G24(6.5,10.5) G25(7.5,10.5) G26(8.5,10.5) G27(9.5,10.5) G28(10.5,10.5) G29(11.5,10.5) G30(12.5,10.5) G31(13.5,10.5) G32(14.5,10.5) G33(15.5,10.5) G34(16.5,10.5) H1(-16.5,9.5) H2(-15.5,9.5) H3(-14.5,9.5) H4(-13.5,9.5) H5(-12.5,9.5) H6(-11.5,9.5) H7(-10.5,9.5) H8(-9.5,9.5) H9(-8.5,9.5) H10(-7.5,9.5) H11(-6.5,9.5) H12(-5.5,9.5) H13(-4.5,9.5) H14(-3.5,9.5) H15(-2.5,9.5) H16(-1.5,9.5) H17(-0.5,9.5) H18(0.5,9.5) H19(1.5,9.5) H20(2.5,9.5) H21(3.5,9.5) H22(4.5,9.5) H23(5.5,9.5) H24(6.5,9.5) H25(7.5,9.5) H26(8.5,9.5) H27(9.5,9.5) H28(10.5,9.5) H29(11.5,9.5) H30(12.5,9.5) H31(13.5,9.5) H32(14.5,9.5) H33(15.5,9.5) H34(16.5,9.5) J1(-16.5,8.5) J2(-15.5,8.5) J3(-14.5,8.5) J4(-13.5,8.5) J5(-12.5,8.5) J6(-11.5,8.5) J7(-10.5,8.5) J8(-9.5,8.5) J9(-8.5,8.5) J10(-7.5,8.5) J11(-6.5,8.5) J12(-5.5,8.5) J13(-4.5,8.5) J14(-3.5,8.5) J15(-2.5,8.5) J16(-1.5,8.5) J17(-0.5,8.5) J18(0.5,8.5) J19(1.5,8.5) J20(2.5,8.5) J21(3.5,8.5) J22(4.5,8.5) J23(5.5,8.5) J24(6.5,8.5) J25(7.5,8.5) J26(8.5,8.5) J27(9.5,8.5) J28(10.5,8.5) J29(11.5,8.5) J30(12.5,8.5) J31(13.5,8.5) J32(14.5,8.5) J33(15.5,8.5) J34(16.5,8.5) K1(-16.5,7.5) K2(-15.5,7.5) K3(-14.5,7.5) K4(-13.5,7.5) K5(-12.5,7.5) K6(-11.5,7.5) K7(-10.5,7.5) K8(-9.5,7.5) K9(-8.5,7.5) K10(-7.5,7.5) K11(-6.5,7.5) K12(-5.5,7.5) K13(-4.5,7.5) K14(-3.5,7.5) K15(-2.5,7.5) K16(-1.5,7.5) K17(-0.5,7.5) K18(0.5,7.5) K19(1.5,7.5) K20(2.5,7.5) K21(3.5,7.5) K22(4.5,7.5) K23(5.5,7.5) K24(6.5,7.5) K25(7.5,7.5) K26(8.5,7.5) K27(9.5,7.5) K28(10.5,7.5) K29(11.5,7.5) K30(12.5,7.5) K31(13.5,7.5) K32(14.5,7.5) K33(15.5,7.5) K34(16.5,7.5) L1(-16.5,6.5) L2(-15.5,6.5) L3(-14.5,6.5) L4(-13.5,6.5) L5(-12.5,6.5) L6(-11.5,6.5) L7(-10.5,6.5) L8(-9.5,6.5) L9(-8.5,6.5) L10(-7.5,6.5) L11(-6.5,6.5) L12(-5.5,6.5) L13(-4.5,6.5) L14(-3.5,6.5) L15(-2.5,6.5) L16(-1.5,6.5) L17(-0.5,6.5) L18(0.5,6.5) L19(1.5,6.5) L20(2.5,6.5) L21(3.5,6.5) L22(4.5,6.5) L23(5.5,6.5) L24(6.5,6.5) L25(7.5,6.5) L26(8.5,6.5) L27(9.5,6.5) L28(10.5,6.5) L29(11.5,6.5) L30(12.5,6.5) L31(13.5,6.5) L32(14.5,6.5) L33(15.5,6.5) L34(16.5,6.5) M1(-16.5,5.5) M2(-15.5,5.5) M3(-14.5,5.5) M4(-13.5,5.5) M5(-12.5,5.5) M6(-11.5,5.5) M7(-10.5,5.5) M8(-9.5,5.5) M9(-8.5,5.5) M10(-7.5,5.5) M11(-6.5,5.5) M12(-5.5,5.5) M13(-4.5,5.5) M14(-3.5,5.5) M15(-2.5,5.5) M16(-1.5,5.5) M17(-0.5,5.5) M18(0.5,5.5) M19(1.5,5.5) M20(2.5,5.5) M21(3.5,5.5) M22(4.5,5.5) M23(5.5,5.5) M24(6.5,5.5) M25(7.5,5.5) M26(8.5,5.5) M27(9.5,5.5) M28(10.5,5.5) M29(11.5,5.5) M30(12.5,5.5) M31(13.5,5.5) M32(14.5,5.5) M33(15.5,5.5) M34(16.5,5.5) N1(-16.5,4.5) N2(-15.5,4.5) N3(-14.5,4.5) N4(-13.5,4.5) N5(-12.5,4.5) N6(-11.5,4.5) N7(-10.5,4.5) N8(-9.5,4.5) N9(-8.5,4.5) N10(-7.5,4.5) N11(-6.5,4.5) N12(-5.5,4.5) N13(-4.5,4.5) N14(-3.5,4.5) N15(-2.5,4.5) N16(-1.5,4.5) N17(-0.5,4.5) N18(0.5,4.5) N19(1.5,4.5) N20(2.5,4.5) N21(3.5,4.5) N22(4.5,4.5) N23(5.5,4.5) N24(6.5,4.5) N25(7.5,4.5) N26(8.5,4.5) N27(9.5,4.5) N28(10.5,4.5) N29(11.5,4.5) N30(12.5,4.5) N31(13.5,4.5) N32(14.5,4.5) N33(15.5,4.5) N34(16.5,4.5) P1(-16.5,3.5) P2(-15.5,3.5) P3(-14.5,3.5) P4(-13.5,3.5) P5(-12.5,3.5) P6(-11.5,3.5) P7(-10.5,3.5) P8(-9.5,3.5) P9(-8.5,3.5) P10(-7.5,3.5) P11(-6.5,3.5) P12(-5.5,3.5) P13(-4.5,3.5) P14(-3.5,3.5) P15(-2.5,3.5) P16(-1.5,3.5) P17(-0.5,3.5) P18(0.5,3.5) P19(1.5,3.5) P20(2.5,3.5) P21(3.5,3.5) P22(4.5,3.5) P23(5.5,3.5) P24(6.5,3.5) P25(7.5,3.5) P26(8.5,3.5) P27(9.5,3.5) P28(10.5,3.5) P29(11.5,3.5) P30(12.5,3.5) P31(13.5,3.5) P32(14.5,3.5) P33(15.5,3.5) P34(16.5,3.5) R1(-16.5,2.5) R2(-15.5,2.5) R3(-14.5,2.5) R4(-13.5,2.5) R5(-12.5,2.5) R6(-11.5,2.5) R7(-10.5,2.5) R8(-9.5,2.5) R9(-8.5,2.5) R10(-7.5,2.5) R11(-6.5,2.5) R12(-5.5,2.5) R13(-4.5,2.5) R14(-3.5,2.5) R15(-2.5,2.5) R16(-1.5,2.5) R17(-0.5,2.5) R18(0.5,2.5) R19(1.5,2.5) R20(2.5,2.5) R21(3.5,2.5) R22(4.5,2.5) R23(5.5,2.5) R24(6.5,2.5) R25(7.5,2.5) R26(8.5,2.5) R27(9.5,2.5) R28(10.5,2.5) R29(11.5,2.5) R30(12.5,2.5) R31(13.5,2.5) R32(14.5,2.5) R33(15.5,2.5) R34(16.5,2.5) T1(-16.5,1.5) T2(-15.5,1.5) T3(-14.5,1.5) T4(-13.5,1.5) T5(-12.5,1.5) T6(-11.5,1.5) T7(-10.5,1.5) T8(-9.5,1.5) T9(-8.5,1.5) T10(-7.5,1.5) T11(-6.5,1.5) T12(-5.5,1.5) T13(-4.5,1.5) T14(-3.5,1.5) T15(-2.5,1.5) T16(-1.5,1.5) T17(-0.5,1.5) T18(0.5,1.5) T19(1.5,1.5) T20(2.5,1.5) T21(3.5,1.5) T22(4.5,1.5) T23(5.5,1.5) T24(6.5,1.5) T25(7.5,1.5) T26(8.5,1.5) T27(9.5,1.5) T28(10.5,1.5) T29(11.5,1.5) T30(12.5,1.5) T31(13.5,1.5) T32(14.5,1.5) T33(15.5,1.5) T34(16.5,1.5) U1(-16.5,0.5) U2(-15.5,0.5) U3(-14.5,0.5) U4(-13.5,0.5) U5(-12.5,0.5) U6(-11.5,0.5) U7(-10.5,0.5) U8(-9.5,0.5) U9(-8.5,0.5) U10(-7.5,0.5) U11(-6.5,0.5) U12(-5.5,0.5) U13(-4.5,0.5) U14(-3.5,0.5) U15(-2.5,0.5) U16(-1.5,0.5) U17(-0.5,0.5) U18(0.5,0.5) U19(1.5,0.5) U20(2.5,0.5) U21(3.5,0.5) U22(4.5,0.5) U23(5.5,0.5) U24(6.5,0.5) U25(7.5,0.5) U26(8.5,0.5) U27(9.5,0.5) U28(10.5,0.5) U29(11.5,0.5) U30(12.5,0.5) U31(13.5,0.5) U32(14.5,0.5) U33(15.5,0.5) U34(16.5,0.5) V1(-16.5,-0.5) V2(-15.5,-0.5) V3(-14.5,-0.5) V4(-13.5,-0.5) V5(-12.5,-0.5) V6(-11.5,-0.5) V7(-10.5,-0.5) V8(-9.5,-0.5) V9(-8.5,-0.5) V10(-7.5,-0.5) V11(-6.5,-0.5) V12(-5.5,-0.5) V13(-4.5,-0.5) V14(-3.5,-0.5) V15(-2.5,-0.5) V16(-1.5,-0.5) V17(-0.5,-0.5) V18(0.5,-0.5) V19(1.5,-0.5) V20(2.5,-0.5) V21(3.5,-0.5) V22(4.5,-0.5) V23(5.5,-0.5) V24(6.5,-0.5) V25(7.5,-0.5) V26(8.5,-0.5) V27(9.5,-0.5) V28(10.5,-0.5) V29(11.5,-0.5) V30(12.5,-0.5) V31(13.5,-0.5) V32(14.5,-0.5) V33(15.5,-0.5) V34(16.5,-0.5) W1(-16.5,-1.5) W2(-15.5,-1.5) W3(-14.5,-1.5) W4(-13.5,-1.5) W5(-12.5,-1.5) W6(-11.5,-1.5) W7(-10.5,-1.5) W8(-9.5,-1.5) W9(-8.5,-1.5) W10(-7.5,-1.5) W11(-6.5,-1.5) W12(-5.5,-1.5) W13(-4.5,-1.5) W14(-3.5,-1.5) W15(-2.5,-1.5) W16(-1.5,-1.5) W17(-0.5,-1.5) W18(0.5,-1.5) W19(1.5,-1.5) W20(2.5,-1.5) W21(3.5,-1.5) W22(4.5,-1.5) W23(5.5,-1.5) W24(6.5,-1.5) W25(7.5,-1.5) W26(8.5,-1.5) W27(9.5,-1.5) W28(10.5,-1.5) W29(11.5,-1.5) W30(12.5,-1.5) W31(13.5,-1.5) W32(14.5,-1.5) W33(15.5,-1.5) W34(16.5,-1.5) Y1(-16.5,-2.5) Y2(-15.5,-2.5) Y3(-14.5,-2.5) Y4(-13.5,-2.5) Y5(-12.5,-2.5) Y6(-11.5,-2.5) Y7(-10.5,-2.5) Y8(-9.5,-2.5) Y9(-8.5,-2.5) Y10(-7.5,-2.5) Y11(-6.5,-2.5) Y12(-5.5,-2.5) Y13(-4.5,-2.5) Y14(-3.5,-2.5) Y15(-2.5,-2.5) Y16(-1.5,-2.5) Y17(-0.5,-2.5) Y18(0.5,-2.5) Y19(1.5,-2.5) Y20(2.5,-2.5) Y21(3.5,-2.5) Y22(4.5,-2.5) Y23(5.5,-2.5) Y24(6.5,-2.5) Y25(7.5,-2.5) Y26(8.5,-2.5) Y27(9.5,-2.5) Y28(10.5,-2.5) Y29(11.5,-2.5) Y30(12.5,-2.5) Y31(13.5,-2.5) Y32(14.5,-2.5) Y33(15.5,-2.5) Y34(16.5,-2.5)
  silkscreen extent -18.27,-17.5 17.5,17.5, body extent -17.5,-17.5 17.5,17.5, height 3.5
H1260NL [mil]
  rect 50x20 smd: 1(0,0)
  oval 50x20 smd: 2(0,-50) 3(0,-100) 4(0,-150) 5(0,-200) 6(0,-250) 7(0,-300) 8(0,-350) 9(380,-350) 10(380,-300) 11(380,-250) 12(380,-200) 13(380,-150) 14(380,-100) 15(380,-50) 16(380,0)
  silkscreen extent 50,-425 325,75
HDR2X10 [mm] "Connector; Header; 10x2 Position"
  rect 1.5x1.5 hole 0.9: 1(0,0)
  round 1.5 hole 0.9: 2(0,2.54) 3(2.54,0) 4(2.54,2.54) 5(5.08,0) 6(5.08,2.54) 7(7.62,0) 8(7.62,2.54) 9(10.16,0) 10(10.16,2.54) 11(12.7,0) 12(12.7,2.54) 13(15.24,0) 14(15.24,2.54) 15(17.78,0) 16(17.78,2.54) 17(20.32,0) 18(20.32,2.54) 19(22.86,0) 20(22.86,2.54)
  silkscreen extent -1.27,-1.27 24.13,3.81
IHLP2525 [mm]
  rect 1.9x3.5 smd: 1(-2.75,0) 2(2.75,0)
  silkscreen extent -3.4,-3.3 3.45,3.2
JAE_KX15_20P [mm]
  rect 0.5x2.4 smd: 1(-3.6,2.65) 2(-3.6,-2.65) 3(-2.8,2.65) 4(-2.8,-2.65) 5(-2,2.65) 6(-2,-2.65) 7(-1.2,2.65) 8(-1.2,-2.65) 9(-0.4,2.65) 10(-0.4,-2.65) 11(0.4,2.65) 12(0.4,-2.65) 13(1.2,2.65) 14(1.2,-2.65) 15(2,2.65) 16(2,-2.65) 17(2.8,2.65) 18(2.8,-2.65) 19(3.6,2.65) 20(3.6,-2.65)
  rect 2.5x2.7 smd: ""(-8.1,0) ""(8.1,0.05)
  round 1.3 hole 0.9: ""(-4.35,0) ""(4.35,0)
  silkscreen extent -8,-3.75 8,3.75
MF03A_N [mm] "SOT23, 3-Leads, Body 2.9x1.3mm, Pitch 0.95mm, Lead Span 2.4mm, IPC Medium Density"
  rect 1.3x0.6 smd: 1(-1.05,0.95) 2(-1.05,-0.95) 3(1.05,0)
  silkscreen extent -1.17,-1.5 0.7,1.92, body extent -0.7,-1.5 0.7,1.5, height 1.12
MF05A_N [mm] "SOT23, 5-Leads, Body 2.9x1.6mm, Pitch 0.95mm, Lead Span 2.8mm, IPC Medium Density"
  rect 1.1x0.65 smd: 1(-1.2,0.95) 2(-1.2,0) 3(-1.2,-0.95) 4(1.2,-0.95) 5(1.2,0.95)
  silkscreen extent -1.32,-1.55 0.25,1.95, body extent -0.9,-1.55 0.9,1.55, height 1.19
MHDR2X3 [mm] "Connector; Header; 3x2 Position"
  rect 1x1 hole 0.6: 1(0,0)
  round 1 hole 0.6: 2(0,1.27) 3(1.27,0) 4(1.27,1.27) 5(2.54,0) 6(2.54,1.27)
  silkscreen extent -0.9,-0.9 3.44,2.17
NHDS-8 [mm]
  rect 2.44x1.12 smd: 1(0,0) 2(0,-2.54) 3(0,-5.08) 4(0,-7.62) 5(8.61,-7.62) 6(8.61,-5.08) 7(8.61,-2.54) 8(8.61,0)
  silkscreen extent 1.83,-8.87 6.78,1.26
OSC_RAKON_IVT3200C [mm] "Oscillator IVT3200C Serie, Corner Concave; 4 pin, 2.50mm L X 3.2mm W X 1.1mm H"
  rect 1.1x0.9 smd: 1(-0.75,1.43) 2(-0.75,-1.43) 3(0.75,-1.43) 4(0.75,1.43)
  Top Layer keep-out lines w0.1: -1.25,-0.68 1.25,-0.68 1.25,0.68 -1.25,0.68 -1.25,-0.68
  silkscreen extent -2.05,-0.6 1.25,1.55, body extent -1.25,-1.6 1.25,1.6, height 1
PW014 [mm] "Shrink Small Outline; 14 Leads; Body Width 4.4 mm; Pitch 0.65 mm"
  rect 0.3x1.65 smd: 1(-1.95,-2.775) 2(-1.3,-2.775) 3(-0.65,-2.775) 4(0,-2.775) 5(0.65,-2.775) 6(1.3,-2.775) 7(1.95,-2.775) 8(1.95,2.775) 9(1.3,2.775) 10(0.65,2.775) 11(0,2.775) 12(-0.65,2.775) 13(-1.3,2.775) 14(-1.95,2.775)
  silkscreen extent -2.77,-2.9 2.55,1.55
QFN32_POWERPAD [mm]
  oval 0.8x0.25 smd: 1(0.4,-1.2)
  rect 0.8x0.25 smd: 2(0.4,-1.7) 3(0.4,-2.2) 4(0.4,-2.7) 5(0.4,-3.2) 6(0.4,-3.7) 7(0.4,-4.2) 8(0.4,-4.7) 17(5.4,-4.7) 18(5.4,-4.2) 19(5.4,-3.7) 20(5.4,-3.2) 21(5.4,-2.7) 22(5.4,-2.2) 23(5.4,-1.7) 24(5.4,-1.2)
  rect 0.25x0.8 smd: 9(1.15,-5.45) 10(1.65,-5.45) 11(2.15,-5.45) 12(2.65,-5.45) 13(3.15,-5.45) 14(3.65,-5.45) 15(4.15,-5.45) 16(4.65,-5.45) 25(4.65,-0.45) 26(4.15,-0.45) 27(3.65,-0.45) 28(3.15,-0.45) 29(2.65,-0.45) 30(2.15,-0.45) 31(1.65,-0.45) 32(1.15,-0.45)
  rect 3x3 smd paste-10: PAD(2.94,-2.978)
  silkscreen extent 0,-5.85 5.8,-0.05
QFN50P400X400-24W4M [mm] "QFN, 24-Leads, Body 4x4mm, Pitch 0.5mm, IPC Low Density"
  oval 1x0.3 smd: 1(-2,1.25) 2(-2,0.75) 3(-2,0.25) 4(-2,-0.25) 5(-2,-0.75) 6(-2,-1.25) 13(2,-1.25) 14(2,-0.75) 15(2,-0.25) 16(2,0.25) 17(2,0.75) 18(2,1.25)
  oval 0.3x1 smd: 7(-1.25,-2) 8(-0.75,-2) 9(-0.25,-2) 10(0.25,-2) 11(0.75,-2) 12(1.25,-2) 19(1.25,2) 20(0.75,2) 21(0.25,2) 22(-0.25,2) 23(-0.75,2) 24(-1.25,2)
  rect 2.3x2.3 smd: PAD(0,0)
  silkscreen extent -3.17,-2.1 2.1,2.1, body extent -2.07,-2.07 2.07,2.07, height 0.8
QFN50P400X400X100-25N-S255 [mm] "QFN,0.50mm pitch,square;6 pin X 6 pin,4.15mm X 4.15mm X 1.00mm H body (w/thermal tab 2.55 X 2.55mm),  IPC Medium Density"
  oval 0.9x0.3 smd mask+0.07: 1(-1.95,1.25) 2(-1.95,0.75) 3(-1.95,0.25) 4(-1.95,-0.25) 5(-1.95,-0.75) 6(-1.95,-1.25) 13(1.95,-1.25) 14(1.95,-0.75) 15(1.95,-0.25) 16(1.95,0.25) 17(1.95,0.75) 18(1.95,1.25)
  oval 0.3x0.9 smd mask+0.07: 7(-1.25,-1.95) 8(-0.75,-1.95) 9(-0.25,-1.95) 10(0.25,-1.95) 11(0.75,-1.95) 12(1.25,-1.95) 19(1.25,1.95) 20(0.75,1.95) 21(0.25,1.95) 22(-0.25,1.95) 23(-0.75,1.95) 24(-1.25,1.95)
  rect 2.55x2.55 smd mask+0.07: 25(0,0)
  silkscreen extent -2.77,-2.1 2.1,2.1, body extent -2.07,-2.07 2.08,2.08, height 1
QFN50P900X900X100-64M [mm] "QFN, 64-Leads, Body 9.1x9.1mm (max), Pitch 0.50mm, IPC Low Density"
  oval 0.75x0.25 smd: 1(-4.575,3.75) 2(-4.575,3.25) 3(-4.575,2.75) 4(-4.575,2.25) 5(-4.575,1.75) 6(-4.575,1.25) 7(-4.575,0.75) 8(-4.575,0.25) 9(-4.575,-0.25) 10(-4.575,-0.75) 11(-4.575,-1.25) 12(-4.575,-1.75) 13(-4.575,-2.25) 14(-4.575,-2.75) 15(-4.575,-3.25) 16(-4.575,-3.75) 33(4.575,-3.75) 34(4.575,-3.25) 35(4.575,-2.75) 36(4.575,-2.25) 37(4.575,-1.75) 38(4.575,-1.25) 39(4.575,-0.75) 40(4.575,-0.25) 41(4.575,0.25) 42(4.575,0.75) 43(4.575,1.25) 44(4.575,1.75) 45(4.575,2.25) 46(4.575,2.75) 47(4.575,3.25) 48(4.575,3.75)
  oval 0.25x0.75 smd: 17(-3.75,-4.575) 18(-3.25,-4.575) 19(-2.75,-4.575) 20(-2.25,-4.575) 21(-1.75,-4.575) 22(-1.25,-4.575) 23(-0.75,-4.575) 24(-0.25,-4.575) 25(0.25,-4.575) 26(0.75,-4.575) 27(1.25,-4.575) 28(1.75,-4.575) 29(2.25,-4.575) 30(2.75,-4.575) 31(3.25,-4.575) 32(3.75,-4.575) 49(3.75,4.575) 50(3.25,4.575) 51(2.75,4.575) 52(2.25,4.575) 53(1.75,4.575) 54(1.25,4.575) 55(0.75,4.575) 56(0.25,4.575) 57(-0.25,4.575) 58(-0.75,4.575) 59(-1.25,4.575) 60(-1.75,4.575) 61(-2.25,4.575) 62(-2.75,4.575) 63(-3.25,4.575) 64(-3.75,4.575)
  rect 5.6x5.6 smd paste-100: PAD(0,0)
  silkscreen extent -5.62,-4.6 4.6,4.6, body extent -4.55,-4.55 4.55,4.55, height 1
QSS-016-01-X-D-DP-A [mm] "0.635mm pitch, 32 pin, high speed socket; differential"
  rect 0.4x2.25 smd mask+0: 1(-7.62,-2.865) 2(-7.62,2.865) 3(-6.985,-2.865) 4(-6.985,2.865) 5(-5.715,-2.865) 6(-5.715,2.865) 7(-5.08,-2.865) 8(-5.08,2.865) 9(-3.81,-2.865) 10(-3.81,2.865) 11(-3.175,-2.865) 12(-3.175,2.865) 13(-1.905,-2.865) 14(-1.905,2.865) 15(-1.27,-2.865) 16(-1.27,2.865) 17(0,-2.865) 18(0,2.865) 19(0.635,-2.865) 20(0.635,2.865) 21(1.905,-2.865) 22(1.905,2.865) 23(2.54,-2.865) 24(2.54,2.865) 25(3.81,-2.865) 26(3.81,2.865) 27(4.445,-2.865) 28(4.445,2.865) 29(5.715,-2.865) 30(5.715,2.865) 31(6.35,-2.865) 32(6.35,2.865)
  rect 2.8x0.45 smd mask+0: 33(-8.064,0) 36(8.065,0)
  rect 4.7x0.45 smd mask+0: 34(-3.175,0) 35(3.175,0)
  round 0.5 hole 1 unplated mask+0: 37(-10.003,2.657) 38(10,2.657)
  Keep-Out Layer pour cut-out: 10.807,2.657 10.779,2.866 10.699,3.06 10.571,3.228 10.403,3.356 10.209,3.436 10,3.464 9.791,3.436 9.597,3.356 9.429,3.228 9.301,3.06 9.221,2.866 9.193,2.657 9.221,2.448 9.301,2.254 9.429,2.086 9.597,1.958 9.791,1.878 10,1.85 10.209,1.878 10.403,1.958 10.571,2.086 10.699,2.254 10.779,2.448
  Keep-Out Layer pour cut-out: -9.196,2.657 -9.224,2.866 -9.304,3.06 -9.432,3.228 -9.6,3.356 -9.794,3.436 -10.003,3.464 -10.212,3.436 -10.406,3.356 -10.574,3.228 -10.702,3.06 -10.782,2.866 -10.81,2.657 -10.782,2.448 -10.702,2.254 -10.574,2.086 -10.406,1.958 -10.212,1.878 -10.003,1.85 -9.794,1.878 -9.6,1.958 -9.432,2.086 -9.304,2.254 -9.224,2.448
  silkscreen extent -10.65,-4.38 10.65,3.6
QSS-048-01-X-D-DP-A [mm] "0.635mm pitch, high speed socket; differential pair array"
  rect 0.4x2.25 smd mask+0: 1(-27.62,-2.865) 2(-27.62,2.865) 3(-26.98,-2.865) 4(-26.98,2.865) 5(-25.716,-2.865) 6(-25.716,2.865) 7(-25.076,-2.865) 8(-25.076,2.865) 9(-23.812,-2.865) 10(-23.812,2.865) 11(-23.172,-2.865) 12(-23.172,2.865) 13(-21.908,-2.865) 14(-21.908,2.865) 15(-21.268,-2.865) 16(-21.268,2.865) 17(-20.004,-2.865) 18(-20.004,2.865) 19(-19.364,-2.865) 20(-19.364,2.865) 21(-18.1,-2.865) 22(-18.1,2.865) 23(-17.46,-2.865) 24(-17.46,2.865) 25(-16.196,-2.865) 26(-16.196,2.865) 27(-15.556,-2.865) 28(-15.556,2.865) 29(-14.292,-2.865) 30(-14.292,2.865) 31(-13.652,-2.865) 32(-13.652,2.865) 33(-7.62,-2.865) 34(-7.62,2.865) 35(-6.98,-2.865) 36(-6.98,2.865) 37(-5.716,-2.865) 38(-5.716,2.865) 39(-5.076,-2.865) 40(-5.076,2.865) 41(-3.812,-2.865) 42(-3.812,2.865) 43(-3.172,-2.865) 44(-3.172,2.865) 45(-1.908,-2.865) 46(-1.908,2.865) 47(-1.268,-2.865) 48(-1.268,2.865) 49(-0.004,-2.865) 50(-0.004,2.865) 51(0.636,-2.865) 52(0.636,2.865) 53(1.9,-2.865) 54(1.9,2.865) 55(2.54,-2.865) 56(2.54,2.865) 57(3.804,-2.865) 58(3.804,2.865) 59(4.444,-2.865) 60(4.444,2.865) 61(5.708,-2.865) 62(5.708,2.865) 63(6.348,-2.865) 64(6.348,2.865) 65(12.38,-2.865) 66(12.38,2.865) 67(13.02,-2.865) 68(13.02,2.865) 69(14.284,-2.865) 70(14.284,2.865) 71(14.924,-2.865) 72(14.924,2.865) 73(16.188,-2.865) 74(16.188,2.865) 75(16.828,-2.865) 76(16.828,2.865) 77(18.092,-2.865) 78(18.092,2.865) 79(18.732,-2.865) 80(18.732,2.865) 81(19.996,-2.865) 82(19.996,2.865) 83(20.636,-2.865) 84(20.636,2.865) 85(21.9,-2.865) 86(21.9,2.865) 87(22.54,-2.865) 88(22.54,2.865) 89(23.804,-2.865) 90(23.804,2.865) 91(24.444,-2.865) 92(24.444,2.865) 93(25.708,-2.865) 94(25.708,2.865) 95(26.348,-2.865) 96(26.348,2.865)
  rect 2.8x0.45 smd mask+0: 97(-28.065,0) 100(-11.935,0) 101(-8.065,0) 104(8.065,0) 105(11.935,0) 108(28.065,0)
  rect 4.7x0.45 smd mask+0: 98(-23.175,0) 99(-16.825,0) 102(-3.175,0) 103(3.175,0) 106(16.825,0) 107(23.175,0)
  round 0.5 hole 1 unplated mask+0: 109(-30,2.655) 110(30,2.655)
  Keep-Out Layer pour cut-out: 30.807,2.655 30.779,2.864 30.699,3.058 30.571,3.226 30.403,3.354 30.209,3.434 30,3.462 29.791,3.434 29.597,3.354 29.429,3.226 29.301,3.058 29.221,2.864 29.193,2.655 29.221,2.446 29.301,2.252 29.429,2.084 29.597,1.956 29.791,1.876 30,1.848 30.209,1.876 30.403,1.956 30.571,2.084 30.699,2.252 30.779,2.446
  Keep-Out Layer pour cut-out: -29.193,2.655 -29.221,2.864 -29.301,3.058 -29.429,3.226 -29.597,3.354 -29.791,3.434 -30,3.462 -30.209,3.434 -30.403,3.354 -30.571,3.226 -30.699,3.058 -30.779,2.864 -30.807,2.655 -30.779,2.446 -30.699,2.252 -30.571,2.084 -30.403,1.956 -30.209,1.876 -30,1.848 -29.791,1.876 -29.597,1.956 -29.429,2.084 -29.301,2.252 -29.221,2.446
  silkscreen extent -30.7,-4.32 30.7,3.6
RESC1005X40N [mm] "Chip Resistor, EIA 0402, Metric 1005, Body 1.0x0.5mm, IPC Medium Density"
  rect 0.6x0.6 smd: 1(-0.45,0) 2(0.45,0)
  body extent -0.52,-0.27 0.53,0.28, height 0.4
SDA08A [mm] "SON, 8-Leads, Body 3x3mm, Pitch 0.5mm, NSC Recommended"
  rect 0.6x0.25 smd paste-0.125 mask+0.051: 1(-1.4,0.75) 2(-1.4,0.25) 3(-1.4,-0.25) 4(-1.4,-0.75) 5(1.4,-0.75) 6(1.4,-0.25) 7(1.4,0.25) 8(1.4,0.75)
  rect 1.6x2 smd paste-0.05 mask+0.051: 9(0,0)
  silkscreen extent -2.52,-1.7 1.85,1.7, body extent -1.55,-1.55 1.55,1.55, height 0.8
SH_CRIMP_1MM_2 [mm]
  rect 1.2x1.8 smd: 0(-1.3,2.5) 0(2.3,2.5)
  rect 0.6x1.55 smd: 1(0,0) 2(1,0)
  silkscreen extent -1.7,0.1 2.7,3.2
SMB_V-RJ45 [mm] "Connector; SMB Straight"
  round 2.5 hole 1.5: 1(0,0) 2(-2.5,-2.5) 2(-2.5,2.5) 2(2.5,-2.5) 2(2.5,2.5)
  silkscreen extent -3.15,-3.15 3.15,3.15
SMT6P150P [mm] "WBC Series Coilcraft Transformer 4.19mmx4.45mm Footprint"
  rect 0.76x1.14 smd: 1(0,0) 2(1.52,0) 3(3.04,0) 4(3.04,-3.05) 5(1.52,-3.05) 6(0,-3.05)
  silkscreen extent -0.53,-3.74 3.57,0.7
SOIC127P600-8AL [mm] "SOIC, 8-Leads, Body 4.9x3.9mm, Pitch 1.27mm, IPC High Density"
  oval 1.7x0.6 smd: 1(-2.45,1.905) 2(-2.45,0.635) 3(-2.45,-0.635) 4(-2.45,-1.905) 5(2.45,-1.905) 6(2.45,-0.635) 7(2.45,0.635) 8(2.45,1.905)
  silkscreen extent -2.57,-2.5 1.2,2.88, body extent -2,-2.5 2,2.5, height 2.72
SOIC127P600X175-8N [mm] "SOIC 8, Pitch 1.27mm - Body 4x5mm, IPC Medium Density"
  rect 1.55x0.6 smd: 1(-2.7,1.905) 2(-2.7,0.635) 3(-2.7,-0.635) 4(-2.7,-1.905) 5(2.7,-1.905) 6(2.7,-0.635) 7(2.7,0.635) 8(2.7,1.905)
  silkscreen extent -2.52,-2.5 1.55,2.88, body extent -3.1,-2.5 3.1,2.5, height 1.75
SON50P300X300X100-11N-R175X250 [mm] "SON, 0.50mm Pitch, 10-pin, 3.00mm W  X 3.00mm L X 1.00mm Height, (w/thermal tab 1.75 X 2.50 mm), IPC Medium Density"
  rect 0.85x0.3 smd: 1(-1.5,1) 2(-1.5,0.5) 3(-1.5,0) 4(-1.5,-0.5) 5(-1.5,-1) 6(1.5,-1) 7(1.5,-0.5) 8(1.5,0) 9(1.5,0.5) 10(1.5,1)
  rect 1.75x2.5 smd: 11(0,0)
  silkscreen extent -2.52,0.88 -2.28,1.13, body extent -1.57,-1.57 1.58,1.58, height 1
SOT23 [mm] "SOT-23; 3 Leads; Body 3.0 x 2.5 mm, inc. leads (LxW max)"
  rect 0.85x1 smd: 1(-0.95,-1.2) 2(0.95,-1.2) 3(0,1.2)
  silkscreen extent -2.05,-1.32 1.28,1.2
SOT23-3 [mm] "SOT-23; 3 Leads; Body 3.0 x 2.5 mm, inc. leads (LxW max)"
  rect 0.95x1 smd: 1(-0.95,-1.125) 2(0.95,-1.125) 3(0,1.125)
  silkscreen extent -2.1,-1.25 1.33,1.13
SOT23-5AL [mm] "SOT23, 5-Leads, Body 2.9x1.6mm, Pitch 0.95mm, Lead Span 2.8mm, IPC High Density"
  rect 0.9x0.65 smd: 1(-1.2,0.95) 2(-1.2,0) 3(-1.2,-0.95) 4(1.2,-0.95) 5(1.2,0.95)
  silkscreen extent -1.32,-1.55 0.35,1.95, body extent -0.9,-1.55 0.9,1.55, height 1.45
SOT23-8 [mm] "SSOP; 8 Leads; Body Width 1.6 mm; Pitch 0.65 mm"
  rect 0.45x1.4 smd: 1(-0.975,-1.1) 2(-0.325,-1.1) 3(0.325,-1.1) 4(0.975,-1.1) 5(0.975,1.1) 6(0.325,1.1) 7(-0.325,1.1) 8(-0.975,1.1)
  silkscreen extent -1.87,-1.22 1.6,1.1
SOT23A-6L [mm] "SOT23, 6-Leads, Body 2.9x1.7mm, Pitch 0.95mm, Lead Span 2.8mm, IPC High Density"
  rect 0.9x0.65 smd: 1(-1.2,0.95) 2(-1.2,0) 3(-1.2,-0.95) 4(1.2,-0.95) 5(1.2,0) 6(1.2,0.95)
  silkscreen extent -1.32,-1.55 0.35,1.95, body extent -0.9,-1.55 0.9,1.55, height 1.45
SOT65P210X110-5N [mm] "SOT353, SC70-5, SOT, 0.65mm Pitch, 5 pin, 1.25mm W X 2.00mm L X 1.10mm H, IPC Medium Density"
  rect 0.95x0.4 smd: 1(-1.1,0.65) 2(-1.1,0) 3(-1.1,-0.65) 4(1.1,-0.65) 5(1.1,0.65)
  silkscreen extent -1.42,-1 0.3,1.48, body extent -1.2,-1.1 1.2,1.1, height 1.1
SOT-23#1 [mm] "SOT-23; 3 Leads; Body 3.0 x 2.6 mm, inc. leads (LxW max)"
  rect 0.9x0.95 smd: 1(-0.95,-1.25) 2(0.95,-1.25) 3(0,1.25)
  silkscreen extent -2.08,-1.37 1.3,1.25
SOT-23#2 [mm]
  rect 0.914x0.914 smd: 1(0,0) 2(1.905,0)
  rect 0.914x1.27 smd: 3(0.965,2.032)
  silkscreen extent -0.51,-0.13 2.41,2.16